# Altium PCB PCB1.PcbDoc
Units mm, origin at the board's own origin, x right, y up, seen from the top; angles counter-clockwise.
Board outline 60 x 30 mm, 2 copper layers (Top Layer, Bottom Layer); 25 components, 16 nets, 65 pads, 2 vias.
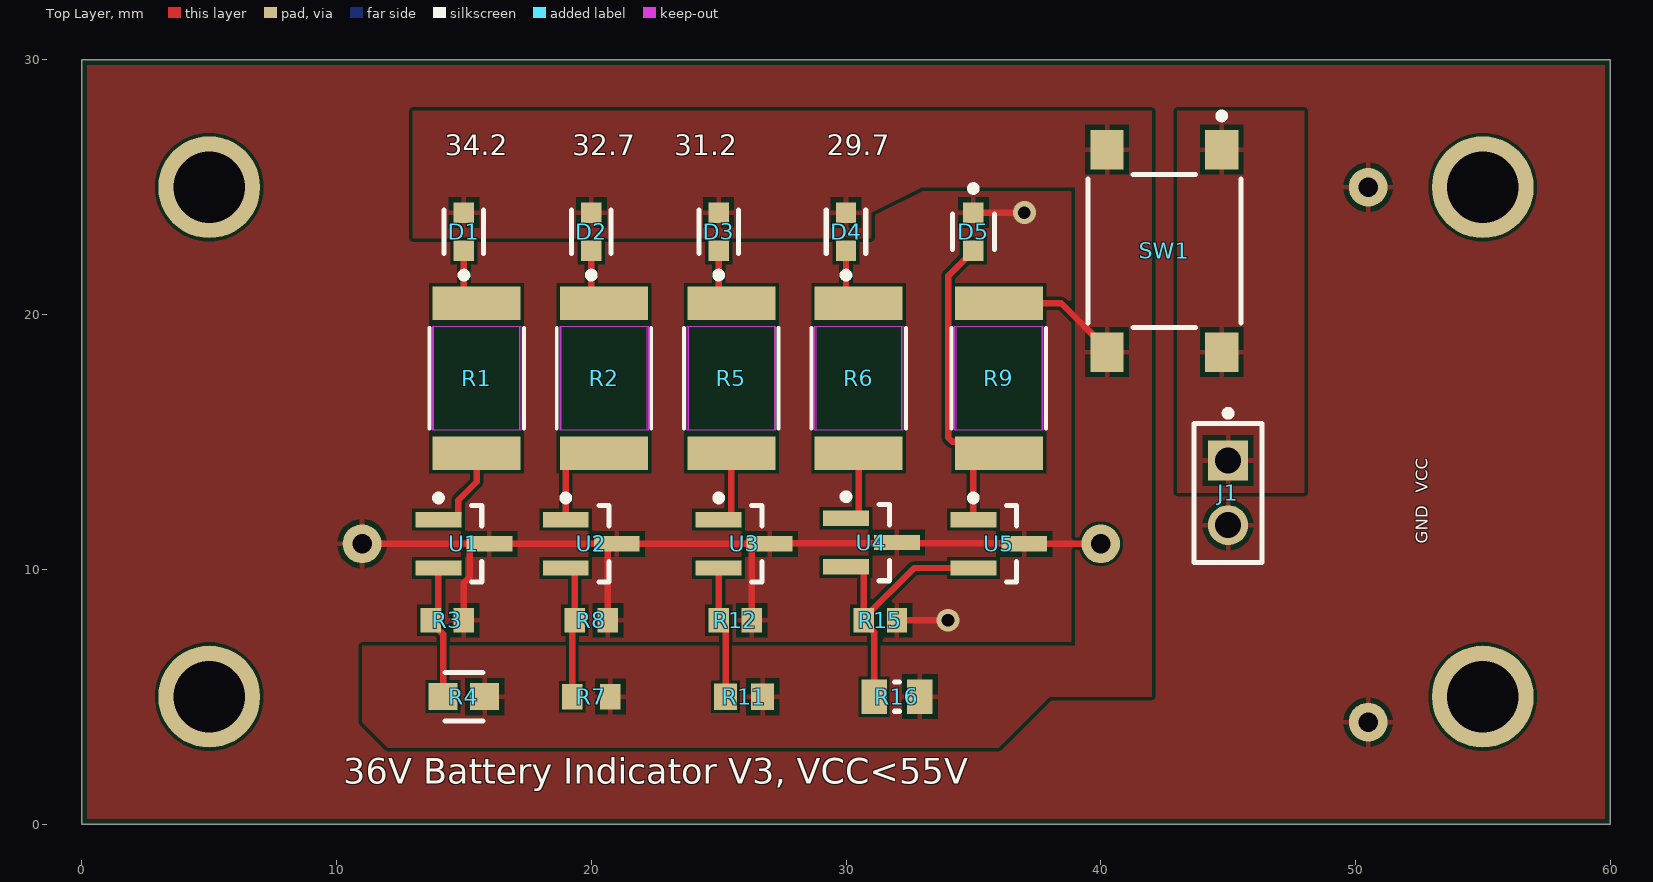
[diagram p0: Top Layer view]
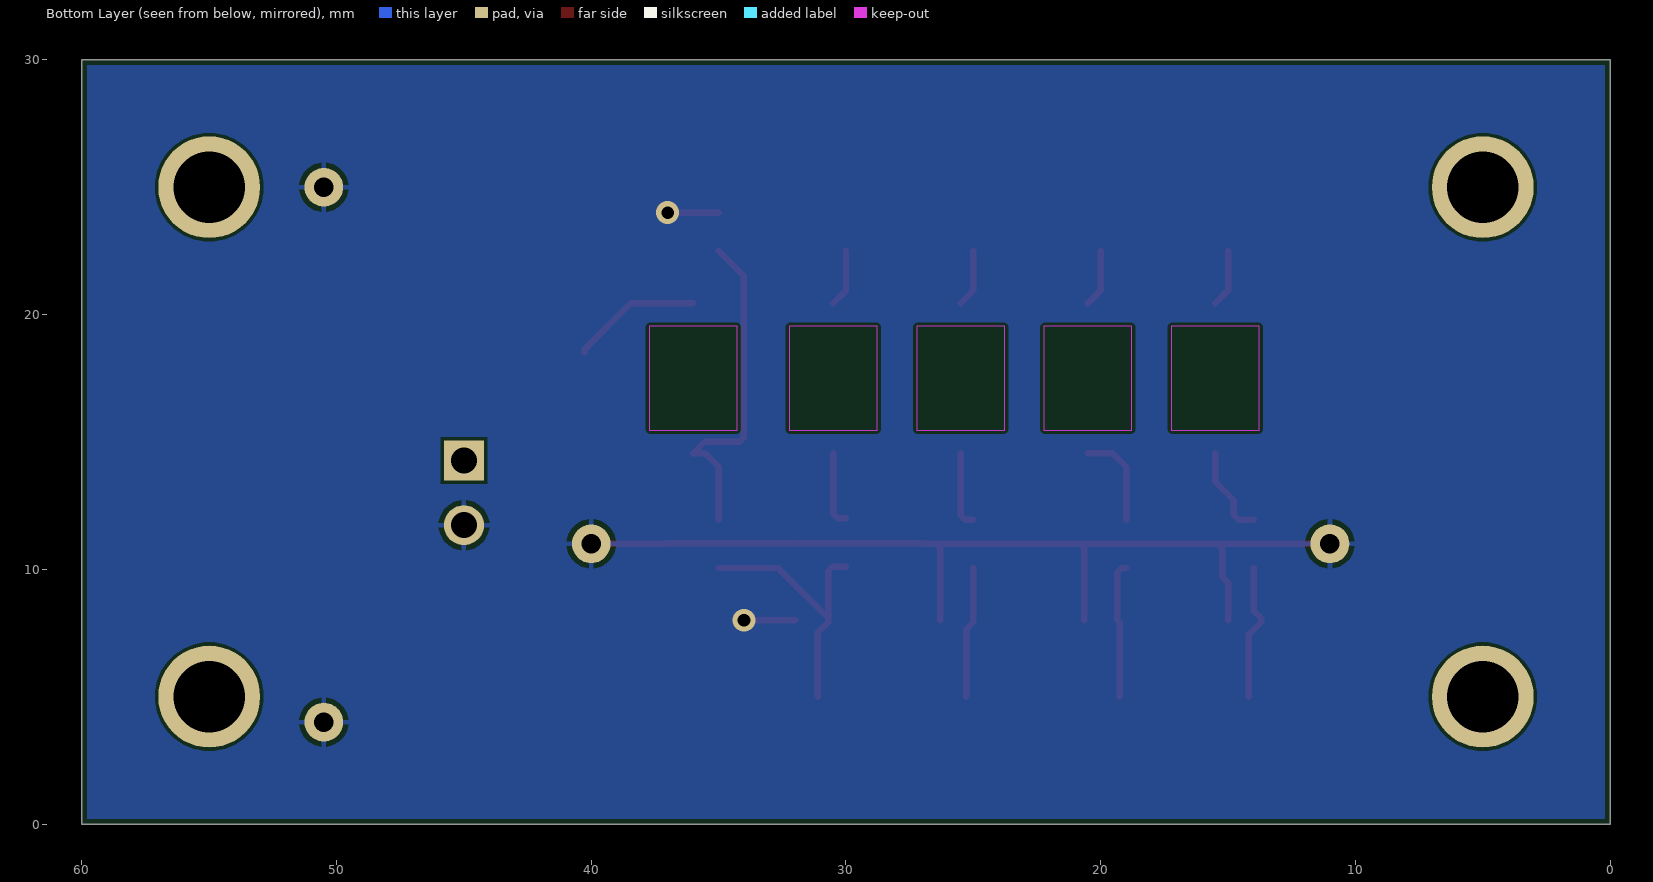
[diagram p1: Bottom Layer view, seen from below]
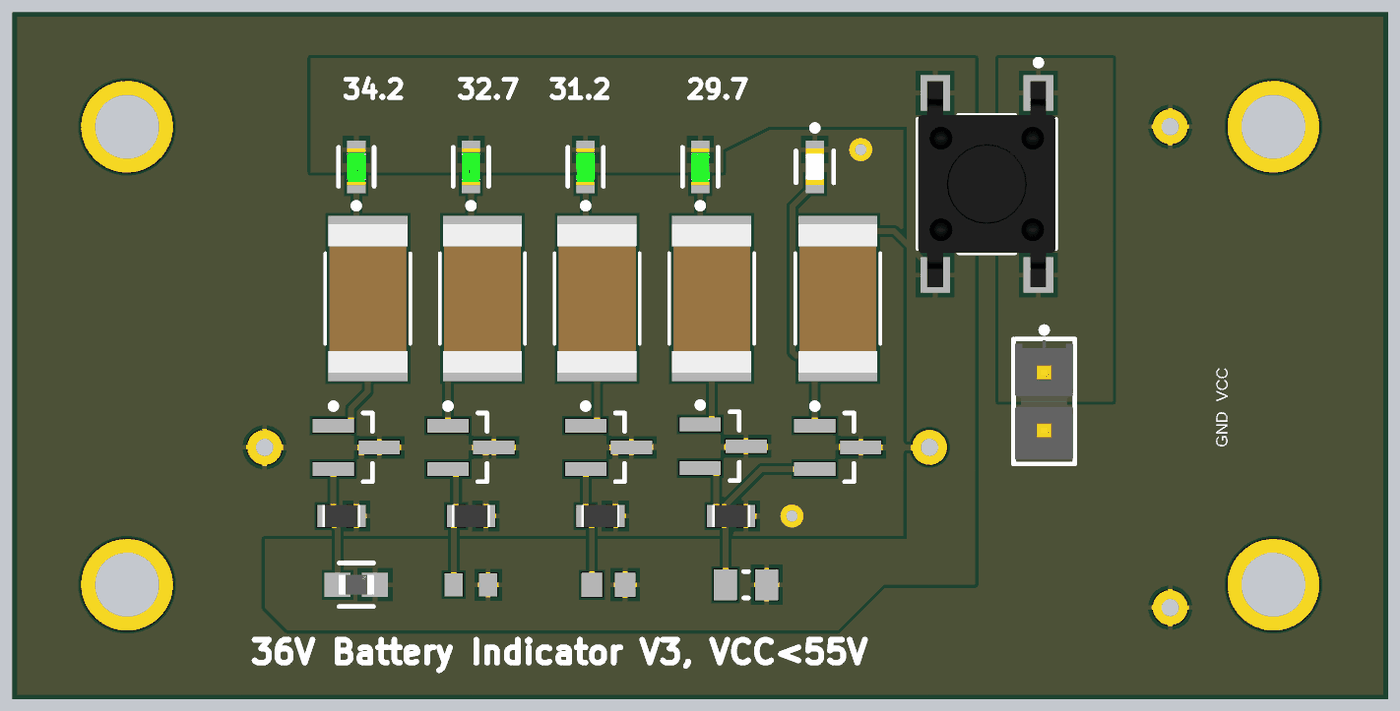
[diagram p2: 3D render of the assembled board from above, using the file's embedded part models]

## Layer stack, top to bottom
Top Solder: solder mask 0.0102, Solder Resist, Dk 3.5
Top Layer: signal copper 0.0356
Dielectric 1: dielectric 0.32, FR-4, Dk 4.8
Bottom Layer: signal copper 0.0356
Bottom Solder: solder mask 0.0102, Solder Resist, Dk 3.5

## Board outline
0,0 60,0 60,30 0,30

## Design rules (kind name [scope] priority, off if disabled: settings)
BoardOutlineClearance [All] p1: gap=0.2 ignorepadtopadclearanceinfootprint=FALSE
Clearance [All] p1: gap=0.127 ignorepadtopadclearanceinfootprint=TRUE except(0.254: Arc-Hole Track-Hole SMDPad-Hole THPad-Hole Via-Hole Fill-Hole Poly-Hole Region-Hole Text-Hole)
ComponentClearance [All] p1: gap=0.127 collisioncheckmode=3 verticalgap=0.127 showdistances=TRUE
DiffPairsRouting [All] p1: maxlimit=0.254 minlimit=0.127 mostfreqgap=0.127 toplayer_minwidth=0.127 toplayer_maxwidth=25.4 toplayer_prefwidth=0.127 bottomlayer_minwidth=0.127 bottomlayer_maxwidth=25.4 bottomlayer_prefwidth=0.127 maxuncoupledlength=12.7
Height [All] p1: minheight=0 maxheight=1816.048 prefheight=12.7
HoleSize [All] p1: absolutevalues=TRUE maxlimit=6.3 minlimit=0.3 maxpercent=80.000 minpercent=20.000
HoleToHoleClearance [All] p1: gap=0.254 allowstackedmicrovias=FALSE
MinimumAnnularRing [All] p1: minimumring=0.152
MinimumSolderMaskSliver [All] p1: minsoldermaskwidth=0.152
PlaneClearance [All] p1: clearance=0.127
PlaneConnect PlaneConnectPowerPads [InPadClass('PowerPads')] p1: planeconnectstyle=Direct reliefexpansion=0.508 reliefentries=4 reliefconductorwidth=0.254 reliefairgap=0.254
PlaneConnect [All] p2: pad.planeconnectstyle=Relief pad.reliefexpansion=0.3 pad.reliefentries=4 pad.reliefconductorwidth=0.127 pad.reliefairgap=0.127 via.planeconnectstyle=Direct via.reliefexpansion=0.3 via.reliefentries=4 via.reliefconductorwidth=0.127 via.reliefairgap=0.127
PolygonConnect PolygonConnectPowerPads [All vs (InPadClass('PowerPads'))] p1: connectstyle=Direct reliefconductorwidth=0.254 reliefentries=4 polygonreliefangle="90 Angle" airgapwidth=0.254
PolygonConnect [All] p2: thpad.connectstyle=Relief thpad.reliefconductorwidth=0.2 thpad.reliefentries=4 thpad.polygonreliefangle="90 Angle" thpad.airgapwidth=0.2 smdpad.connectstyle=Relief smdpad.reliefconductorwidth=0.2 smdpad.reliefentries=4 smdpad.polygonreliefangle="90 Angle" smdpad.airgapwidth=0.2 via.connectstyle=Direct via.reliefconductorwidth=0.127 via.reliefentries=4 via.polygonreliefangle="90 Angle" via.airgapwidth=0.127
RoutingVias [All] p1: holewidth=0.3 width=0.6 viastyle="Through Hole" minholewidth=0.3 minwidth=0.6 maxholewidth=0.6 maxwidth=6.6
SilkToSilkClearance [All] p1: silktosilkclearance=0.127
SilkToSolderMaskClearance [IsPad] p1: minsilkscreentomaskgap=0.127 clearancetoexposedcopper=TRUE
SolderMaskExpansion [All] p1: expansion=0.051 istentingtop=FALSE
SupplyNets "Schematic Supply Nets_2" [InNet('T_GND')] p1: voltage=0.000
SupplyNets "Schematic Supply Nets_1" [InNet('VCC')] p2: voltage=0.000
UnRoutedNet [All] p1: checkbadconnections=TRUE
Width Width_10mil [All] p1: maxlimit=25.4 minlimit=0.254 preferedwidth=0.254 minimp=50.000000 maximp=50.000000 favimp=50.000000
Width Width_6mil [All] p2: maxlimit=25.4 minlimit=0.152 preferedwidth=0.152 minimp=50.000000 maximp=50.000000 favimp=50.000000
Width Power_20mil [All] p3: maxlimit=25.4 minlimit=0.508 preferedwidth=0.508 minimp=50.000000 maximp=50.000000 favimp=50.000000
Width Power_12mil [All] p4: maxlimit=25.4 minlimit=0.305 preferedwidth=0.305 minimp=50.000000 maximp=50.000000 favimp=50.000000
Width Width_5mil [All] p5: maxlimit=25.4 minlimit=0.127 preferedwidth=0.127 minimp=50.000000 maximp=50.000000 favimp=50.000000
19 further rules are at their usual default settings.

## Components (designator, comment, footprint, x,y, rotation, side; value= is the part's Value field where it differs from the comment)
D1 "LTST-C193KGKT-5A" FP-LTST-C193KGKT-5A-MFG 15,23.25 r90 top
D2 "LTST-C193KGKT-5A" FP-LTST-C193KGKT-5A-MFG 20,23.25 r90 top
D3 "LTST-C193KGKT-5A" FP-LTST-C193KGKT-5A-MFG 25,23.25 r90 top
D4 "LTST-C193KGKT-5A" FP-LTST-C193KGKT-5A-MFG 30,23.25 r90 top
D5 "LTST-C193KRKT-5A" FP-LTST-C193KRKT-5A-MFG 35,23.25 r270 top
J1 "TSW-102-07-L-S" FP-TSW-102-07-L-S-MFG 45,13 r270 top
R1 "RMCF2512JT1K80" RES_RMCF2512_STP 15.5,17.5 r90 top
R2 "RMCF2512JT1K80" RES_RMCF2512_STP 20.5,17.5 r90 top
R3 "CRCW060310K0FKEA" RESC1609X50X30NL8T20 14.35,8 r180 top value="10k Ohm"
R4 "CRCW0603127KFKEA" FP-CRCW0603-e3-IPC_A 15,5 r0 top
R5 "RMCF2512JT1K80" RES_RMCF2512_STP 25.5,17.5 r90 top
R6 "RMCF2512JT1K80" RES_RMCF2512_STP 30.5,17.5 r90 top
R7 "RC0603FR-07121KL" RESC1608X55X25ML10T15 20,5 r0 top value="121 kOhm"
R8 "CRCW060310K0FKEA" RESC1609X50X30NL8T20 20,8 r180 top value="10k Ohm"
R9 "RMCF2512JT1K80" RES_RMCF2512_STP 36,17.5 r90 top
R11 "ERJ-3EKF1153V" RESC1608X55X30ML15T15 26,5 r0 top value="115 KOhm"
R12 "CRCW060310K0FKEA" RESC1609X50X30NL8T20 25.65,8 r180 top value="10k Ohm"
R15 "CRCW060310K0FKEA" RESC1609X50X30NL8T20 31.35,8 r180 top value="10k Ohm"
R16 "RC0805FR-109K09L" RESC2013X60X35NL10T20 32,5 r0 top value="109k Ohm"
SW1 "PTS645SH50SMTR92LFS" FP-PTS645SH50SMTR92LFS-MFG 42.5,22.5 r270 top
U1 "TL431CL3T" SOT23-3_M 15,11 r0 top
U2 "TL431CL3T" SOT23-3_M 20,11 r0 top
U3 "TL431CL3T" SOT23-3_M 26,11 r0 top
U4 "TL431CL3T" SOT23-3_M 31,11.05 r0 top
U5 "TL431CL3T" SOT23-3_M 36,11 r0 top

## Footprints (in the part's own frame and the unit in brackets; to place one, negate y for a bottom-side part, rotate by r counter-clockwise, add the part's x,y. Pads: shape width x height; smd on the part's side, far side on the other; paste and mask are expansions set on the pad)
FP-CRCW0603-e3-IPC_A [mm]
  rect 1.135x1.062 smd paste+0 mask+0: 1(-0.815,0) 2(0.815,0)
  silkscreen extent -0.75,-0.95 0.75,0.95, body extent -0.77,-0.43 0.77,0.43, height 0.5
FP-LTST-C193KGKT-5A-MFG [mm]
  rect 0.8x0.8 smd paste+0 mask+0: 1(-0.75,0) 2(0.75,0)
  silkscreen extent -1.82,-0.77 0.85,0.77, body extent -0.8,-0.4 0.8,0.4, height 0.45
FP-LTST-C193KRKT-5A-MFG [mm]
  rect 0.8x0.8 smd paste+0 mask+0: 1(-0.75,0) 2(0.75,0)
  silkscreen extent -1.82,-0.82 0.7,0.82, body extent -0.8,-0.4 0.8,0.4, height 0.45
FP-PTS645SH50SMTR92LFS-MFG [mm]
  rect 1.55x1.3 smd paste+0 mask+0: 1(-3.975,2.25) 2(3.975,2.25) 3(-3.975,-2.25) 4(3.975,-2.25)
  silkscreen extent -5.42,-3 3,3, body extent -4.5,-3 4.5,3, height 4.3
FP-TSW-102-07-L-S-MFG [mm]
  rect 1.57x1.57 hole 1.02 paste-2539.97 mask+0: 1(-1.27,0)
  round 1.57 hole 1.02 paste-2539.97 mask+0: 2(1.27,0)
  silkscreen extent -3.25,-1.34 2.73,1.34, body extent -2.83,-1.44 2.83,1.44, height 0.25
RES_RMCF2512_STP [mil]
  rect 52x136 smd paste+0 mask+0: 1(-116,0) 2(116,0)
  Top Layer keep-out region: -80,-66 -80,66 80,66 80,-66
  Keep-Out Layer region: -80,-68 -80,68 80,68 80,-68
  silkscreen extent -78,-73 78,73, body extent -128,-68 128,68, height 28
RESC1608X55X25ML10T15 [mm] "Chip Resistor, 2-Leads, Body 1.60x0.80mm, IPC Low Density"
  rect 0.8x1 smd: 1(-0.75,0) 2(0.75,0)
  body extent -0.85,-0.45 0.85,0.45, height 0.55
RESC1608X55X30ML15T15 [mm] "Chip Resistor, 2-Leads, Body 1.60x0.80mm, IPC Low Density"
  rect 0.9x1.05 smd: 1(-0.725,0) 2(0.725,0)
  body extent -0.87,-0.48 0.87,0.48, height 0.55
RESC1609X50X30NL8T20 [mm] "Chip Resistor, 2-Leads, Body 1.65x0.95mm, IPC Medium Density"
  rect 0.8x0.95 smd: 1(-0.65,0) 2(0.65,0)
  body extent -0.82,-0.48 0.82,0.48, height 0.5
RESC2013X60X35NL10T20 [mm] "Chip Resistor, 2-Leads, Body 2.00x1.25mm, IPC Medium Density"
  rect 1x1.35 smd: 1(-0.9,0) 2(0.9,0)
  silkscreen extent -0.1,-0.58 0.1,0.58, body extent -1.05,-0.67 1.05,0.67, height 0.6
SOT23-3_M [mm] "SOT23, 3-Leads, Body 2.9x1.3mm, Pitch 0.95mm, Lead Span 2.4mm, IPC Low Density"
  rect 1.8x0.6 smd: 1(-1,0.95) 2(-1,-0.95) 3(1,0)
  silkscreen extent -1.12,-1.5 0.7,1.92, body extent -0.7,-1.52 0.7,1.52, height 1.12

## Part data
D1 D2 D3 D4: library part CMP-2000-06622-2, "LED GREEN CLEAR CHIP SMD", Case Code (Imperial)=0603, Case Code (Metric)=1608, Color=Green, Forward Current=30mA, Forward Voltage=2.3V, Lens Color=Colorless, Max Operating Temperature=85°C, Min Operating Temperature=-55°C, Package Quantity=3000, Power Dissipation=75mW, Reverse Voltage=5V, Test Current=5mA, Case/Package=0603, Depth=0.8mm, Dominant Wavelength=576.5nm, Height=0.35mm, Illumination Color=Green, Lead Free="Lead Free", Length=1.6mm, Lens Style=Diffused, Lens Transparency=Clear, Luminous Intensity=28mcd, Mount="Surface Mount", Number of Elements=1, Number of LEDs=1, Number of Pins=2, Packaging="Tape and Reel", Power Rating=75mW, Radiation Hardening=No, Viewing Angle=130°, Width=0.8mm
D5: library part CMP-2000-06623-2, "LED RED CLEAR CHIP SMD", Case Code (Imperial)=0603, Case Code (Metric)=1608, Color=Red, Forward Current=5mA, Forward Voltage=2.3V, Lens Color=Colorless, Max Operating Temperature=85°C, Min Operating Temperature=-55°C, Package Quantity=3000, Power Dissipation=50mW, Reverse Voltage=5V, Case/Package=0603, Depth=0.8mm, Dominant Wavelength=631nm, Height=0.35mm, Illumination Color=Red, Lead Free="Lead Free", Length=1.6mm, Lens Style=Diffused, Lens Transparency=Clear, Luminous Intensity=45mcd, Mount="Surface Mount", Number of Elements=1, Number of LEDs=1, Number of Pins=2, Packaging="Tape and Reel", Radiation Hardening=No, Test Current=5mA, Viewing Angle=130°, Width=0.8mm
J1: library part CMP-02766-001428-1, "CONN HEADER VERT 2POS 2.54MM", Color=Black, Current Rating=7.6A, Max Operating Temperature=125°C, Max Voltage Rating (AC)=550V, Min Operating Temperature=-55°C, Package Quantity=1, Connector Type="Male Pin", Contact Material=Bronze, Contact Mating Length=0.23inch, Contact Plating=Gold, Contact Type="Male Pin", Depth=2.54mm, Gender=Male, Housing Color=Black, Housing Material=Polyester, Lead Free="Lead Free", Length=5.08mm, Max Current Rating=7.6A, Mount="Through Hole", Number of Contacts=2, Number of Positions=2, Number of Rows=1, Orientation=Straight, Packaging=Bulk, Pitch=2.54mm, Radiation Hardening=No, REACH SVHC="No SVHC", RoHS Compliant=Yes, Series=TSW, Termination=Solder, Voltage Rating=550V, Width=2.54mm
R1 R2 R5 R6 R9: "No Description Available", Mfr_Name="Stackpole International", Resistance=1k8, Rate=1W
R3 R8 R12 R15: library part CMP-1666-00005-4, "Chip Resistor, 10 KOhm, +/- 1%, 100 mW, -55 to 155 degC, 0603 (1608 Metric), RoHS, Tape and Reel", Manufacturer="Vishay Semiconductor", Max Operating Temperature="155 degC", Min Operating Temperature="-55 degC", Package Quantity=5000, Voltage Rating="75 V", ComponentLink1Description="Manufacturer URL", ComponentLink1URL=http://www.vishay.com/, ComponentLink2Description=Datasheet, ComponentLink2URL=https://datasheet.ciiva.com/11809/0900766b80d98afc-11809037.pdf, DatasheetVersion=06/2012, Height="0.45 mm", Length="1.55 mm", Mounting Technology="Surface Mount", PackageDescription="2-Pin Surface Mount Device, Body 1.575 x 0.85 mm", PackageReference=0603, Packaging="Tape and Reel", REACH SVHC=Unknown, RoHSCompliant=true
R4: library part CMP-2000-03875-2, "RES Thick Film, 127kΩ, 1%, 0.1W, 100ppm/°C, 0603", Case Code (Imperial)=0603, Case Code (Metric)=1608, Max Operating Temperature=155°C, Max Power Dissipation=100mW, Min Operating Temperature=-55°C, Package Quantity=10, Resistance=127kR, Temperature Coefficient=100ppm/°C, Tolerance=1%, Voltage Rating=75V, Case/Package=0603, Composition="Thick Film", Contact Plating=Tin, Depth=0.85mm, Features="Automotive AEC-Q200", Height=0.02inch, Lead Free="Lead Free", Length=1.55mm, Military Standard=Not, Number of Pins=2, Number of Terminations=2, Packaging="Tape and Reel", Power Rating=100mW, Radiation Hardening=No, Termination=SMD/SMT, Voltage Rating (DC)=75V, Weight=7.1E-05oz, Width=0.033inch, Working Voltage=75V
R7: library part CMP-2000-04893-1, Manufacturer=Yageo, Part Number=RC0603FR-07121KL
R11: library part CMP-2000-00208-1, Manufacturer=Panasonic, Part Number=ERJ-3EKF1153V
R16: library part CMP-2001-01325-1, Manufacturer=Yageo, Part Number=RC0805FR-109K09L
SW1: library part CMP-10040-000028-1, "SWITCH TACTILE SPST-NO 0.05A 12V", Case/Package=SMD/SMT, Color=Black, Current Rating=50mA, Max Operating Temperature=60°C, Max Voltage Rating (DC)=12V, Min Operating Temperature=-20°C, Operating Force=200gf, Package Quantity=1000, Actuator Material=Nylon, Actuator Type=Standard, Contact Material=Bronze, Contact Plating=Silver, Depth=9mm, Illumination Type=Non-Illuminated, Lead Free="Lead Free", Length=6mm, Max Current Rating=50mA, Mechanical Life=100000Cycles, Mount="Surface Mount", Orientation=Straight, Packaging="Tape and Reel", REACH SVHC="No SVHC", Switch Function=Off-Mom, Termination="Gull Wing", Throw Configuration=SPST, Voltage Rating (DC)=12V
U1 U2 U3 U4 U5: library part CMP-0242-00063-1, "Programmable Voltage Reference, 2.5 to 36V, 3-Pin SOT23-3, Tape and Reel", ComponentLink1Description="Manufacturer URL", ComponentLink1URL=http://www.st.com, ComponentLink2Description=Datasheet, ComponentLink2URL=http://www.st.com/internet/com/TECHNICAL_RESOURCES/TECHNICAL_LITERATURE/DATASHEET/CD00000986.pdf, DatasheetVersion=Oct-2011, PackageDescription="3-Pin SOT-23 Package 0.95 mm Pitch, 2.4 mm Lead Span", PackageReference=SOT23-3, PackageVersion=2011

## Free pads (board coordinates)
  round 4 hole 2.8 unplated: 10(5,25) 11(55,25) 12(5,5) 13(55,5)
  round 1.524 hole 0.762: 15(50.5,4) 16(50.5,25) 17(11,11) 18(40,11)

## Via types
v1: diameter 0.9, hole 0.5, Top Layer to Bottom Layer, 2 vias

## Nets (pads, with @x,y where several pads share a name; then routed paths per layer and width w, separated by ;. In a path a pad name is that pad's centre, name@x,y a point inside that pad or via, vN(x,y) a via of type N, cw(c..) or ccw(c..) an arc to the next point about the centre after c; other vN are vias at no path point)
NetD1_1: D1.1 R1.2 | length 2.3
  Top Layer w0.254: D1.1 15,20.946 R1.2
NetD2_1: D2.1 R2.2 | length 2.3
  Top Layer w0.254: D2.1 20,20.946 R2.2
NetD3_1: D3.1 R5.2 | length 2.3
  Top Layer w0.254: D3.1 25,20.946 R5.2
NetD4_1: D4.1 R6.2 | length 2.3
  Top Layer w0.254: D4.1 30,20.946 R6.2
NetD5_2: D5.2 R9.1 U5.1 | length 13.3
  Top Layer w0.254: U5.1 35,14.02 35.533,14.554 R9.1 35.543,15.011 34.168,15.011 34.019,15.16 34.019,21.519 D5.2
NetR1_1: R1.1 U1.1 | length 3.6
  Top Layer w0.254: U1.1 14.6,11.95 14.773,12.123 14.773,12.708 15.5,13.435 R1.1
NetR2_1: R2.1 U2.1 | length 3.8
  Top Layer w0.254: U2.1 19,14.02 19.533,14.554 R2.1
NetR3_2: R3.2 R4.1 U1.2 | length 5.4
  Top Layer w0.254: U1.2 14,8.375 13.7,8.075 R3.2 13.7,7.925 14.185,7.44 R4.1
NetR5_1: R5.1 U3.1 | length 3
  Top Layer w0.254: U3.1 25.327,11.95 25.5,12.123 R5.1
NetR6_1: R6.1 U4.1 | length 3
  Top Layer w0.254: U4.1 30.327,12 30.5,12.173 R6.1
NetR7_1: R7.1 R8.2 U2.2 | length 5.3
  Top Layer w0.254: U2.2 19.177,10.05 19.35,9.877 R8.2 19.25,7.9 R7.1
NetR11_1: R11.1 R12.2 U3.2 | length 5.2
  Top Layer w0.254: U3.2 R12.2 25,7.925 25.275,7.65 R11.1
NetR15_2: R15.2 R16.1 U4.2 U5.2 | length 11
  Top Layer w0.254: U4.2 30.527,10.1 30.7,9.927 R15.2@30.7,8.075 ; R16.1 31.1,7.525 30.7,7.925 R15.2 R15.2@30.7,8.075 ; U5.2 32.675,10.05 R15.2@30.7,8.075
T_GND: D5.1 J1.2 pad.15 pad.16 pad.17 pad.18 R3.1 R8.1 R12.1 R15.1 U1.3 U2.3 U3.3 U4.3 U5.3 | length 42.4
  Top Layer w0.254: pad.17 U1.3@15.4,11 ; R3.1 15,9.474 15.227,9.701 15.227,10.827 U1.3@15.4,11 ; R8.1 20.65,10.827 U2.3@20.823,11 ; R12.1 26.3,10.827 U3.3@26.473,11 ; R15.1 v1(34,8) ; D5.1 v1(37,24) ; pad.18 U5.3 36.975,11.025 32.025,11.025 U4.3 31.975,11.025 27.025,11.025 U3.3 U3.3@26.473,11 ; U1.3@15.4,11 U1.3 U2.3@20.823,11 ; U2.3@20.823,11 U2.3 U3.3@26.473,11
T_VCC: D1.2 D2.2 D3.2 D4.2 R4.2 R7.2 R9.2 R11.2 R16.2 SW1.3 SW1.4 | length 5.1
  Top Layer w0.254: R9.2 38.454,20.446 40.25,18.65 SW1.4
VCC: J1.1 SW1.1 SW1.2

## Polygon pours and split planes (outlines as drawn)
T_GND on Top Layer "T_GND_L01_P005" (solid, remove dead copper, pour order 5): -0.209,0.127 59.791,0.127 59.791,30.127 -0.209,30.127
VCC on Top Layer "VCC_L01_P004" (solid, remove dead copper, pour order 4): 43,28 43,13 48,13 48,28
T_VCC on Top Layer "T_VCC_L01_P001" (solid, remove dead copper, pour order 1): 42,17 42,5 38,5 36,3 12,3 11,4 11,7 39,7 39,17
T_VCC on Top Layer "T_VCC_L01_P000" (solid, remove dead copper, pour order 0): 13,23 31,23 31,24 33,25 34,25 39,25 39,17 42,17 42,28 13,28
T_GND on Bottom Layer "T_GND_L02_P006" (solid, remove dead copper, pour order 6): 0,0 60,0 60,30 0,30
T_GND on Bottom Layer "T_GND_L02_P002" (solid, remove dead copper, pour order 2): 0,0 60,0 60,30 0,30

## Silkscreen, mask and mechanical layers (free items; w line width, h text height)
Top Overlay:
  text "34.2" at 14.254,26.254 h0.8
  text "32.7" at 19.254,26.254 h0.8
  text "31.2" at 23.254,26.254 h0.8
  text "29.7" at 29.254,26.254 h0.8
  text "VCC" at 53,13 h0.8 r90
  text "GND" at 52.991,11 h0.8 r90
  text "36V Battery Indicator V3, VCC<55V" at 10.254,1.587 h1